# EAGLE board japon (EAGLE 7.6.0)

Size 179.1 x 179.1 mm. Coordinates in mm from the lower left corner, seen from the top.
Outline: 179.1,179.1 0,179.1 0,0 66.5,0 66.5,15.1 112.6,15.1 112.6,0 179.1,0 179.1,179.1
Copper layers (1*16): Top 0.035mm / dielectric 1.5mm / Bottom 0.035mm
Design rules "default": minimum track width 10mil, minimum drill 24mil, track to track 8mil, track to pad 8mil, pad to pad 8mil, via to via 8mil, smd to smd 8mil, copper to edge 40mil, drill to drill 8mil, minimum pad ring 10mil, minimum via ring 8mil, stop-mask expansion 4mil, vias tented up to drill 0mil, thermal gap 10mil
Holes 3.2 mm at 176.24,2.8 2.8,176.24 2.8,2.8 176.24,176.24

## Footprints (pad centres in the part's own frame; a part is rotated, then mirrored left to right if it is on the bottom)
1X02 = drill 1.016 long: 1 -1.27,0; 2 1.27,0
1X05 = drill 1.016 long: 1 -5.08,0; 2 -2.54,0; 3 0,0; 4 2.54,0; 5 5.08,0
1X04 = drill 1.016 long: 1 -3.81,0; 2 -1.27,0; 3 1.27,0; 4 3.81,0
1X01 = drill 1.016 octagon: 1 0,0
1X06 = drill 1.016 long: 1 -6.35,0; 2 -3.81,0; 3 -1.27,0; 4 1.27,0; 5 3.81,0; 6 6.35,0
1X03 = drill 1.016 long: 1 -2.54,0; 2 0,0; 3 2.54,0
2X02 = drill 1.016 octagon: 1 -1.27,-1.27; 2 -1.27,1.27; 3 1.27,-1.27; 4 1.27,1.27
AXIAL-0.3 = drill 0.9 pad 1.88: P$1 -3.81,0; P$2 3.81,0
0207/15 = drill 0.813 octagon: 1 -7.62,0; 2 7.62,0
2X04 = drill 1.016 octagon: 1 -3.81,-1.27; 2 -3.81,1.27; 3 -1.27,-1.27; 4 -1.27,1.27; 5 1.27,-1.27; 6 1.27,1.27; 7 3.81,-1.27; 8 3.81,1.27
MEGASLAVE = drill 1.016 pad 1.88: 2 6.35,24.13; 3 3.81,24.13; 4 1.27,24.13; 5 -1.27,24.13; 6 -3.81,24.13; 14 16.51,24.13; 15 19.05,24.13; 16 21.59,24.13; 17 24.13,24.13; 18 26.67,24.13; 19 29.21,24.13; 20 31.75,24.13; 21 34.29,24.13; GND. -8.89,-24.13; VIN -6.35,-24.13
MEGAMASTER = drill 1.016 pad 1.88: 14 16.51,24.13; 15 19.05,24.13; 16 21.59,24.13; 17 24.13,24.13; 18 26.67,24.13; 19 29.21,24.13; 20 31.75,24.13; 21 34.29,24.13 | drill 1.016 pad 1.88 octagon: 23 44.45,21.59; 25 44.45,19.05; 27 44.45,16.51; 29 44.45,13.97; 31 44.45,11.43; 33 44.45,8.89; 35 44.45,6.35; 37 44.45,3.81; 39 44.45,1.27; 41 44.45,-1.27; 43 44.45,-3.81

## Placement (x,y rotation side)
ARDUINOSWITCH  [1X02]  -518.16,288.29 0 top  (outside the outline)
BLUETOOTH  [1X05]  -396.24,223.52 0 top  (outside the outline)
DIGITALSWITCH  [1X02]  -488.95,146.05 0 top  (outside the outline)
IMU  [1X04]  -433.07,165.1 0 top  (outside the outline)
INTSWITCH  [1X02]  -504.19,165.1 0 top  (outside the outline)
INTSWITHC  [1X01]  -435.61,176.53 0 top  (outside the outline)
LCD  [1X04]  -420.37,172.72 0 top  (outside the outline)
LEDARDUINOS  [1X02]  -300.99,200.66 0 top  (outside the outline)
LEDMOTORS  [1X02]  -547.37,-3.81 0 top  (outside the outline)
LEDRASP  [1X02]  -441.96,171.45 0 top  (outside the outline)
LEDVICTIMA  [1X02]  -500.38,158.75 0 top  (outside the outline)
LEVELC1  [1X06]  -452.12,139.7 0 top  (outside the outline)
LEVELC2  [1X06]  -429.26,52.07 0 top  (outside the outline)
LIDARBACK  [1X05]  -417.83,271.78 0 top  (outside the outline)
LIDARFRONT  [1X05]  -463.55,297.18 0 top  (outside the outline)
LIDARLEFT  [1X05]  -490.22,152.4 0 top  (outside the outline)
LIDARRIGHT  [1X05]  -524.51,223.52 0 top  (outside the outline)
LIMIT1  [1X03]  -449.58,171.45 0 top  (outside the outline)
LIMIT2  [1X03]  -458.47,171.45 0 top  (outside the outline)
LIMIT3  [1X03]  -467.36,171.45 0 top  (outside the outline)
M1  [1X06]  -542.29,91.44 0 top  (outside the outline)
M2  [1X06]  -501.65,139.7 0 top  (outside the outline)
M3  [1X06]  -435.61,146.05 0 top  (outside the outline)
M4  [1X06]  -452.12,146.05 0 top  (outside the outline)
MASTERSUPPLY  [1X02]  -502.92,146.05 0 top  (outside the outline)
MASTERSWITCH  [2X02]  -506.73,92.71 0 top  (outside the outline)
MLXSLEFT  [1X04]  -471.17,125.73 0 top  (outside the outline)
MLXSRIGHT  [1X04]  -467.36,165.1 0 top  (outside the outline)
MOTOR1  [1X02]  -539.75,295.91 0 top  (outside the outline)
MOTOR2  [1X02]  -486.41,171.45 0 top  (outside the outline)
MOTOR3  [1X02]  -495.3,171.45 0 top  (outside the outline)
MOTOR4  [1X02]  -504.19,171.45 0 top  (outside the outline)
MOTORES  [1X02]  -433.07,171.45 0 top  (outside the outline)
MOTORSWITCH  [1X02]  -438.15,152.4 0 top  (outside the outline)
RASPLEFT  [1X04]  -478.79,165.1 0 top  (outside the outline)
RASPRIGHT  [1X04]  -490.22,165.1 0 top  (outside the outline)
RASPSUPPLY  [1X02]  -468.63,232.41 0 top  (outside the outline)
RASPSWITCH  [1X02]  -477.52,158.75 0 top  (outside the outline)
REGULADOR3V  [1X04]  -434.34,158.75 0 top  (outside the outline)
REGULADOR5V  [1X03]  -449.58,158.75 0 top  (outside the outline)
REGULADORRASPS  [1X03]  -439.42,139.7 0 top  (outside the outline)
RESISTENCIAARDUINOS  1M  [AXIAL-0.3]  -443.23,177.8 0 top  (outside the outline)
RESISTENCIALIMIT1  [0207/15]  -541.02,-10.16 0 top  (outside the outline)
RESISTENCIALIMIT2  [0207/15]  -541.02,-15.24 0 top  (outside the outline)
RESISTENCIALIMIT3  [0207/15]  -541.02,-20.32 0 top  (outside the outline)
RESISTENCIAMOTOR  [0207/15]  -541.02,-25.4 0 top  (outside the outline)
RESISTENCIARASPS  1M  [AXIAL-0.3]  -464.82,177.8 0 top  (outside the outline)
RESISTENCIAVICTIMAS  1M  [AXIAL-0.3]  -454.66,177.8 0 top  (outside the outline)
SENSORCOLOR  [2X04]  -452.12,54.61 0 top  (outside the outline)
U$1  MEGASLAVE  [MEGASLAVE]  -115.57,377.19 0 top  (outside the outline)
U$2  MEGAMASTER  [MEGAMASTER]  -283.21,96.52 270 top  (outside the outline)

## Library data of the parts
ARDUINOSWITCH BLUETOOTH DIGITALSWITCH IMU INTSWITCH INTSWITHC LCD LEDARDUINOS LEDMOTORS LEDRASP LEDVICTIMA LEVELC1 LEVELC2 LIDARBACK LIDARFRONT LIDARLEFT LIDARRIGHT LIMIT1-LIMIT3 M1-M4 MASTERSUPPLY MASTERSWITCH MLXSLEFT MLXSRIGHT MOTOR1-MOTOR4 MOTORES MOTORSWITCH RASPLEFT RASPRIGHT RASPSUPPLY RASPSWITCH REGULADOR3V REGULADOR5V REGULADORRASPS SENSORCOLOR = pinhead
RESISTENCIAARDUINOS RESISTENCIARASPS RESISTENCIAVICTIMAS = SparkFun-Resistors; PROD_ID: RES-09559
RESISTENCIALIMIT1-RESISTENCIALIMIT3 RESISTENCIAMOTOR = resistor
U$1 U$2 = ROBORREGOS

## Nets
3V: IMU.4 LEVELC1.3 LIDARBACK.1 LIDARFRONT.1 LIDARLEFT.1 LIDARRIGHT.1 MLXSLEFT.1 MLXSRIGHT.1 REGULADOR3V.3
5V: DIGITALSWITCH.1 INTSWITCH.1 LCD.1 LEVELC2.4 LIMIT1.3 LIMIT2.3 LIMIT3.3 M1.4 M2.4 REGULADOR5V.3 SENSORCOLOR.8
12V: MASTERSUPPLY.1 MASTERSWITCH.1
12V~: MASTERSWITCH.3 RASPSUPPLY.1
12V~~: ARDUINOSWITCH.1 MASTERSWITCH.2 MOTORSWITCH.1
12V~~~: MASTERSWITCH.4 RASPSWITCH.1
BT: BLUETOOTH.2 U$2.43
DIGSW: DIGITALSWITCH.2 U$2.23
ENCODER1: M1.5 U$2.19
ENCODER2: M2.5 U$2.18
GND: BLUETOOTH.3 IMU.3 LCD.2 LEVELC1.4 LEVELC2.3 LIDARBACK.2 LIDARFRONT.2 LIDARLEFT.2 LIDARRIGHT.2 M1.3 M2.3 M3.3 M4.3 MASTERSUPPLY.2 MLXSLEFT.2 MLXSRIGHT.2 MOTORES.2 RASPLEFT.3 RASPRIGHT.3 RASPSUPPLY.2 REGULADOR3V.2 REGULADOR3V.4 REGULADOR5V.2 REGULADORRASPS.2 RESISTENCIAARDUINOS.P$2 RESISTENCIALIMIT1.2 RESISTENCIALIMIT2.2 RESISTENCIALIMIT3.2 RESISTENCIAMOTOR.2 RESISTENCIARASPS.P$2 RESISTENCIAVICTIMAS.P$2 SENSORCOLOR.7 U$1.GND.
INTSW: INTSWITCH.2 INTSWITHC.1
KEY: BLUETOOTH.1 U$2.41
LIMIT1: LIMIT1.1 U$2.33
LIMIT2: LIMIT2.1 U$2.35
LIMIT3: LIMIT3.1 U$2.37
M1.1: M1.1 MOTOR1.1
M1.2: M1.2 MOTOR1.2
M2.1: M2.1 MOTOR2.1
M2.2: M2.2 MOTOR2.2
M3.1: M3.1 MOTOR3.1
M3.2: M3.2 MOTOR3.2
M4.1: M4.1 MOTOR4.1
M4.2: M4.2 MOTOR4.2
MAIN12: ARDUINOSWITCH.2 LEDARDUINOS.1 REGULADOR3V.1 REGULADOR5V.1 U$1.VIN
MOTOR12: LEDMOTORS.1 MOTORES.1 MOTORSWITCH.2
OUT: SENSORCOLOR.6 U$1.2
R1: LEDARDUINOS.2 RESISTENCIAARDUINOS.P$1
R2: LEDRASP.2 RESISTENCIARASPS.P$1
R3: LEDVICTIMA.2 RESISTENCIAVICTIMAS.P$1
R4: LEDMOTORS.2 RESISTENCIAMOTOR.1
R5: LIMIT1.2 RESISTENCIALIMIT1.1
R6: LIMIT2.2 RESISTENCIALIMIT2.1
R7: LIMIT3.2 RESISTENCIALIMIT3.1
RASPS5: LEDRASP.1 RASPLEFT.4 RASPRIGHT.4 REGULADORRASPS.3
RASPS12: RASPSWITCH.2 REGULADORRASPS.1
RX: U$1.15 U$2.17
RX0: LEVELC2.2 U$1.19
RX0PI: LEVELC1.6 RASPLEFT.2
RX1: LEVELC2.5 U$1.17
RX1PI: LEVELC1.1 RASPRIGHT.2
RX2: BLUETOOTH.4 U$2.15
S0: SENSORCOLOR.1 U$1.3
S1: SENSORCOLOR.3 U$1.4
S2: SENSORCOLOR.4 U$1.5
S3: SENSORCOLOR.2 U$1.6
SCL: IMU.2 LCD.3 LIDARBACK.4 LIDARFRONT.4 LIDARLEFT.4 LIDARRIGHT.4 U$2.21
SCL~: MLXSLEFT.3 MLXSRIGHT.3 U$1.21
SDA: IMU.1 LCD.4 LIDARBACK.3 LIDARFRONT.3 LIDARLEFT.3 LIDARRIGHT.3 U$2.20
SDA~: MLXSLEFT.4 MLXSRIGHT.4 U$1.20
TX: U$1.14 U$2.16
TX0: LEVELC2.1 U$1.18
TX0PI: LEVELC1.5 RASPLEFT.1
TX1: LEVELC2.6 U$1.16
TX1PI: LEVELC1.2 RASPRIGHT.1
TX2: BLUETOOTH.5 U$2.14
VICTIMA: LEDVICTIMA.1 U$2.39
XSHUT1: LIDARFRONT.5 U$2.25
XSHUT2: LIDARRIGHT.5 U$2.27
XSHUT3: LIDARLEFT.5 U$2.29
XSHUT4: LIDARBACK.5 U$2.31

## Tracks (layer width: path | path; a pad name or v marks a point on that pad's centre or on a via)
3V  (8 unrouted)
5V  (10 unrouted)
12V  (1 unrouted)
12V~  (1 unrouted)
12V~~  (2 unrouted)
12V~~~  (1 unrouted)
BT  (1 unrouted)
DIGSW  (1 unrouted)
ENCODER1  (1 unrouted)
ENCODER2  (1 unrouted)
GND  (32 unrouted)
INTSW  (1 unrouted)
KEY  (1 unrouted)
LIMIT1  (1 unrouted)
LIMIT2  (1 unrouted)
LIMIT3  (1 unrouted)
M1.1  (1 unrouted)
M1.2  (1 unrouted)
M2.1  (1 unrouted)
M2.2  (1 unrouted)
M3.1  (1 unrouted)
M3.2  (1 unrouted)
M4.1  (1 unrouted)
M4.2  (1 unrouted)
MAIN12  (4 unrouted)
MOTOR12  (2 unrouted)
OUT  (1 unrouted)
R1  (1 unrouted)
R2  (1 unrouted)
R3  (1 unrouted)
R4  (1 unrouted)
R5  (1 unrouted)
R6  (1 unrouted)
R7  (1 unrouted)
RASPS5  (3 unrouted)
RASPS12  (1 unrouted)
RX  (1 unrouted)
RX0  (1 unrouted)
RX0PI  (1 unrouted)
RX1  (1 unrouted)
RX1PI  (1 unrouted)
RX2  (1 unrouted)
S0  (1 unrouted)
S1  (1 unrouted)
S2  (1 unrouted)
S3  (1 unrouted)
SCL  (6 unrouted)
SCL~  (2 unrouted)
SDA  (6 unrouted)
SDA~  (2 unrouted)
TX  (1 unrouted)
TX0  (1 unrouted)
TX0PI  (1 unrouted)
TX1  (1 unrouted)
TX1PI  (1 unrouted)
TX2  (1 unrouted)
VICTIMA  (1 unrouted)
XSHUT1  (1 unrouted)
XSHUT2  (1 unrouted)
XSHUT3  (1 unrouted)
XSHUT4  (1 unrouted)